# EAGLE board Tarea1 (EAGLE 9.6.2)
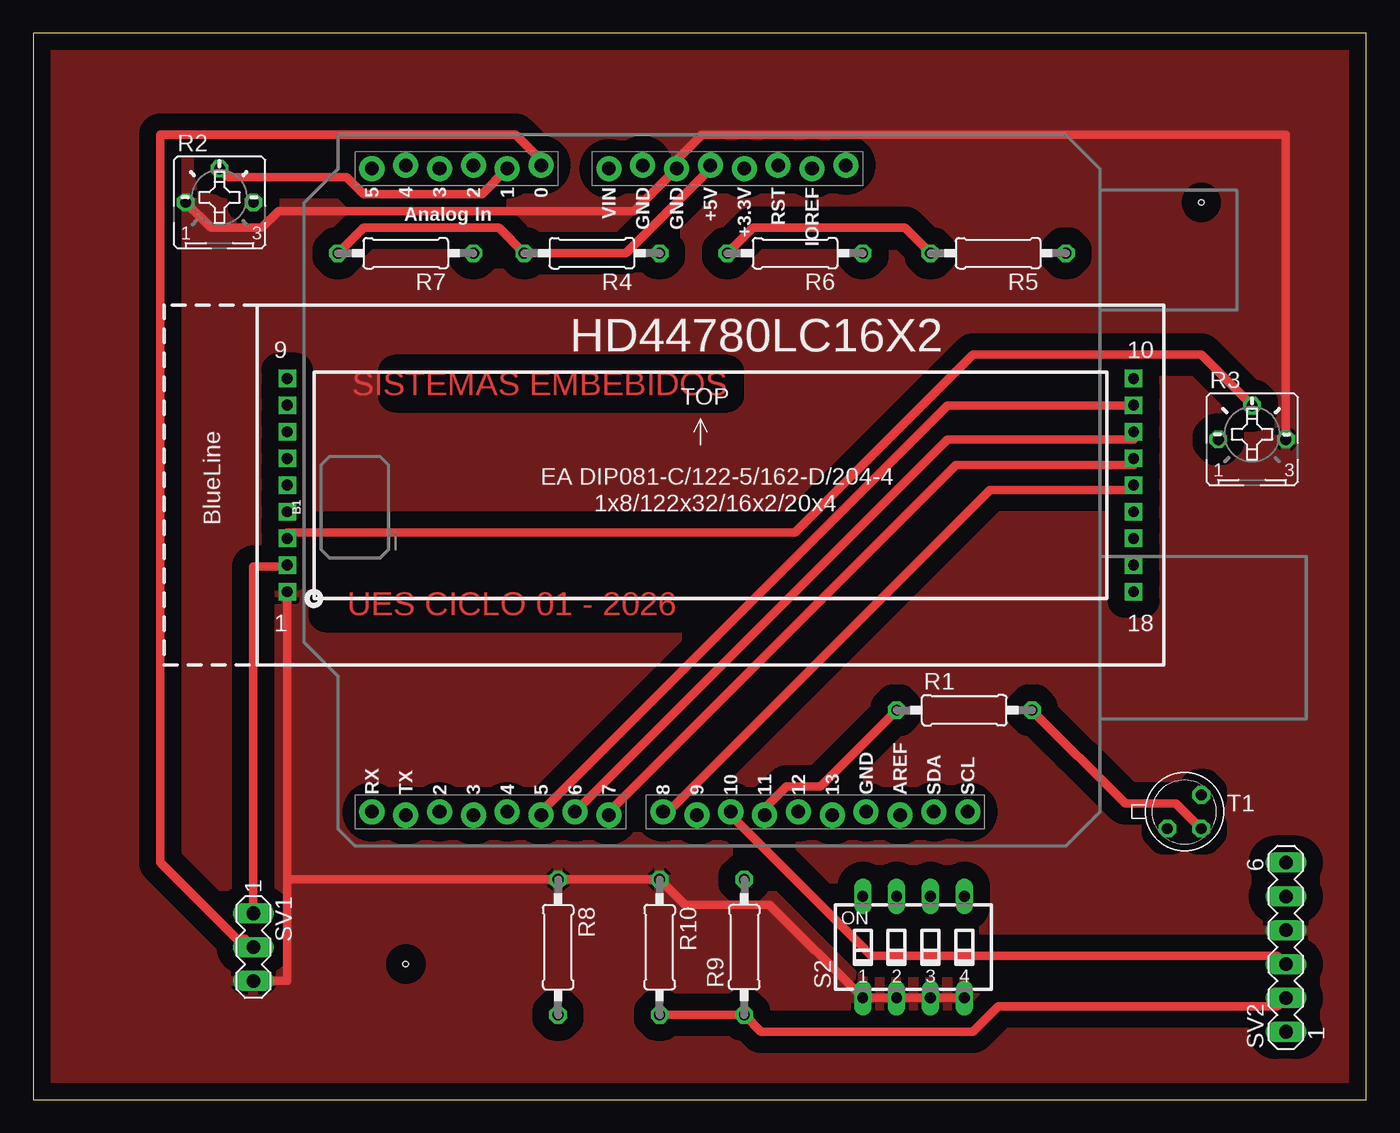
[diagram p0: board, top side]
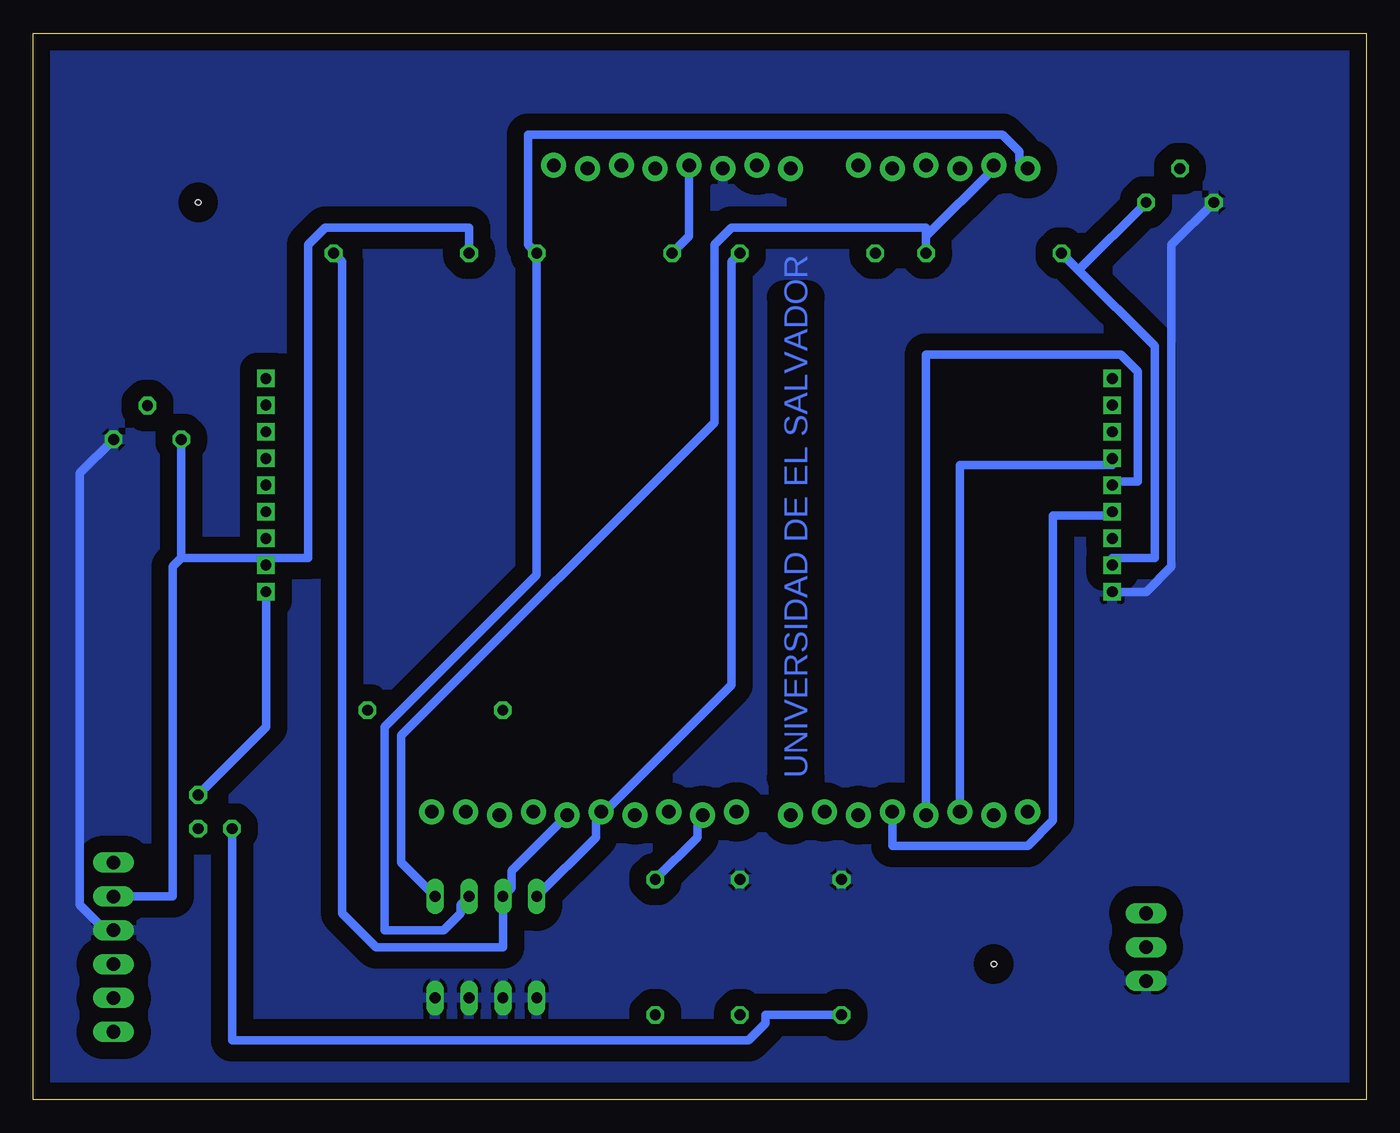
[diagram p1: board, bottom side, seen from below]

Size 100 x 80 mm. Coordinates in mm from the lower left corner, seen from the top.
Outline: 0,0 100,0 100,80 0,80 0,0
Copper layers (1*16): Top 0.035mm / dielectric 1.5mm / Bottom 0.035mm
Design rules "default *": minimum track width 25mil, minimum drill 0.35mm, track to track 18mil, track to pad 18mil, pad to pad 6mil, via to via 16mil, smd to smd 12mil, copper to edge 20mil, drill to drill 6mil, minimum pad ring 10mil, minimum via ring 8mil, stop-mask expansion 4mil, vias tented up to drill 0mil, thermal gap 10mil
Holes 0.41 mm at 27.94,10.16 87.63,67.31 27.94,10.16 87.63,67.31

## Footprints (pad centres in the part's own frame; a part is rotated, then mirrored left to right if it is on the bottom)
UNO_R3_SHIELD_LOCK = drill 1.016 pad 1.88: 3.3V 24.13,-3.81; 5V 24.384,-1.27; A0 24.384,11.43; A1 24.13,13.97; A2 24.384,16.51; A3 24.13,19.05; A4 24.384,21.59; A5 24.13,24.13; AREF -24.384,-15.494; D2 -24.13,19.05; D3 -24.384,16.51; D4 -24.13,13.97; D5 -24.384,11.43; D6 -24.13,8.89; D7 -24.384,6.35; D8 -24.13,2.286; D9 -24.384,-0.254; D10 -24.13,-2.794; D11 -24.384,-5.334; D12 -24.13,-7.874; D13 -24.384,-10.414; GND@0 24.13,1.27; GND@1 24.384,3.81; GND@2 -24.13,-12.954; IOREF 24.13,-8.89; NC 24.384,-11.43; RES 24.384,-6.35; RX -24.13,24.13; SCL -24.13,-20.574; SDA -24.13,-18.034; TX -24.384,21.59; VIN 24.13,6.35
EA_DIP = drill 0.813 pad 1.27 square: 1 0,0; 2 0,2; 3 0,4; 4 0,6; 5 0,8; 6 0,10; 7 0,12; 8 0,14; 9 0,16; 10 63.5,16; 11 63.5,14; 12 63.5,12; 13 63.5,10; 14 63.5,8; 15 63.5,6; 16 63.5,4; 17 63.5,2; 18 63.5,0
0207/10 = drill 0.813 octagon: 1 -5.08,0; 2 5.08,0
B25P = drill 0.813 octagon: A -2.54,0; E 2.54,0; S 0,2.54
SD4-04 = drill 0.813 long: 1 -3.81,-3.81; 2 -1.27,-3.81; 3 1.27,-3.81; 4 3.81,-3.81; 5 3.81,3.81; 6 1.27,3.81; 7 -1.27,3.81; 8 -3.81,3.81
MA03-1 = drill 1.016 long: 1 -2.54,0; 2 0,0; 3 2.54,0
MA06-1 = drill 1.016 long: 1 -6.35,0; 2 -3.81,0; 3 -1.27,0; 4 1.27,0; 5 3.81,0; 6 6.35,0
TO18 = drill 0.813 octagon: 1 -1.27,-1.27; 2 1.27,-1.27; 3 1.27,1.27

## Placement (x,y rotation side)
B1  ARDUINO_UNO_R3_SHIELDUNO_R3_SHIELD_LOCK  [UNO_R3_SHIELD_LOCK]  49.53,45.72 90 top
HD44780LC16X2  EA_DIP  [EA_DIP]  19.05,38.1 0 top
R1  2.2k  [0207/10]  69.85,29.21 0 top
R2  1k  [B25P]  13.97,67.31 0 top
R3  1k  [B25P]  91.44,49.53 0 top
R4  4.7k  [0207/10]  41.91,63.5 180 top
R5  4.7k  [0207/10]  72.39,63.5 180 top
R6  4.7k  [0207/10]  57.15,63.5 180 top
R7  4.7k  [0207/10]  27.94,63.5 180 top
R8  220  [0207/10]  39.37,11.43 270 top
R9  12k  [0207/10]  53.34,11.43 90 top
R10  22k  [0207/10]  46.99,11.43 270 top
S2  [SD4-04]  66.04,11.43 0 top
SV1  MODULO LM35  [MA03-1]  16.51,11.43 270 top
SV2  MODULO BTHC05  [MA06-1]  93.98,11.43 90 top
T1  2N2222  [TO18]  86.36,21.59 0 top

## Library data of the parts
B1 = SparkFun-Boards
HD44780LC16X2 = display-lcd
R1 R4-R10 = rcl; SPICEPREFIX: R
R2 R3 = pot
S2 = switch-dil; OC_FARNELL: unknown; OC_NEWARK: unknown
SV1 SV2 = con-lstb; OC_FARNELL: unknown; OC_NEWARK: unknown
T1 = transistor

## Nets
+5V: B1.5V HD44780LC16X2.2 HD44780LC16X2.17 R2.E R3.A R4.2 R5.2 R6.2 R7.2 SV1.1 SV2.5
GND: B1.GND@0 HD44780LC16X2.1 R2.A R3.E R8.1 R10.1 S2.1 S2.2 S2.3 S2.4 SV1.3 SV2.4
N$1: B1.D12 R4.1 S2.8
N$2: B1.A1 R2.S
N$3: B1.A0 SV1.2
N$4: B1.D13 R5.1 S2.7
N$5: B1.A5 R6.1 S2.6
N$6: B1.A4 R7.1 S2.5
N$7: R8.2 T1.1
N$8: R1.2 T1.2
N$9: HD44780LC16X2.18 T1.3
N$10: R9.1 R10.2 SV2.2
N$11: HD44780LC16X2.3 R3.S
N$12: B1.D11 R1.1
N$13: B1.D9 R9.2
N$14: B1.D10 SV2.3
N$15: B1.D2 HD44780LC16X2.6
N$16: B1.D3 HD44780LC16X2.5
N$17: B1.D4 HD44780LC16X2.4
N$18: B1.D5 HD44780LC16X2.11
N$19: B1.D6 HD44780LC16X2.12
N$20: B1.D7 HD44780LC16X2.13
N$21: B1.D8 HD44780LC16X2.14

## Tracks (layer width: path | path; a pad name or v marks a point on that pad's centre or on a via)
+5V
  Top 0.635: R5.2 65.41,65.41 53.98,65.41 R6.2 | R7.2 24.77,65.41 34.92,65.41 R4.2 44.45,63.5 50.8,69.85 B1.5V | SV1.1 16.51,40.01 19.05,40.01 HD44780LC16X2.2
  Bottom 0.635: 88.9,40.64 82.55,40.64 | R3.A 88.9,40.64 | SV2.5 89.53,15.24 89.53,40.01 88.9,40.64 | R6.2 50.8,64.77 B1.5V | R7.2 21.59,62.23 | 21.59,62.23 15.88,56.52 15.88,40.64 19.05,40.64 HD44780LC16X2.2 | 21.59,62.23 R2.E | 82.55,40.64 79.38,40.64 79.38,64.14 78.11,65.41 67.31,65.41 R5.2 | 82.55,40.64 HD44780LC16X2.17
GND
  Top 0.635: S2.4 S2.3 S2.2 S2.1 55.24,14.61 48.9,14.61 R10.1 R8.1 19.05,16.51 | 19.05,16.51 19.05,8.89 SV1.3 | 19.05,16.51 HD44780LC16X2.1 | R2.A 13.34,65.41 17.14,65.41 18.41,66.67 45.09,66.67 B1.GND@0 48.26,70.48 50.16,72.39 93.98,72.39 R3.E
  Bottom 0.635: R3.E 96.52,46.99 96.52,14.61 94.61,12.7 SV2.4 | R2.A 14.61,64.14 14.61,40.01 16.51,38.1 HD44780LC16X2.1
  pour Top (isolate 1.27): 0,80.01 100.33,80.01 100.33,0 0,0
  pour Bottom (isolate 1.27): 0,80.01 100.33,80.01 100.33,0 0,0
N$1
  Bottom 0.635: S2.8 57.78,19.68 57.78,21.59 B1.D12 57.15,21.59 47.62,31.11 47.62,62.87 R4.1
N$2
  Top 0.635: R2.S 14.61,69.22 23.5,69.22 24.77,67.94 33.66,67.94 B1.A1
N$3
  Top 0.635: SV1.2 15.88,12.06 15.24,12.06 9.53,17.78 9.53,72.39 36.2,72.39 38.1,70.48 B1.A0
N$4
  Bottom 0.635: B1.D13 64.14,17.14 64.14,15.88 S2.7 64.77,11.43 74.3,11.43 76.83,13.97 76.83,62.87 R5.1
N$5
  Bottom 0.635: S2.6 67.94,14.61 67.94,13.97 69.22,12.7 73.66,12.7 73.66,27.94 62.23,39.37 R6.1 62.87,64.14 62.87,72.39 27.3,72.39 26.04,71.12 26.04,70.48 B1.A5
N$6
  Bottom 0.635: S2.5 72.39,17.78 72.39,27.3 48.9,50.8 48.9,64.14 47.62,65.41 33.02,65.41 33.02,64.77 | R7.1 33.02,64.77 | 33.02,64.77 27.94,69.85 B1.A4
N$7
  Bottom 0.635: R8.2 45.09,6.35 45.09,5.71 46.35,4.45 85.09,4.45 T1.1
N$8
  Top 0.635: R1.2 81.92,22.23 85.72,22.23 T1.2
N$9
  Bottom 0.635: T1.3 82.55,27.94 HD44780LC16X2.18
N$10
  Top 0.635: R10.2 R9.1 54.61,5.08 70.48,5.08 72.39,6.99 93.34,6.99 SV2.2
N$11
  Top 0.635: R3.S 87.63,55.88 70.48,55.88 57.15,42.55 19.05,42.55 HD44780LC16X2.3
N$12
  Top 0.635: R1.1 59.05,23.5 56.52,23.5 54.61,21.59 B1.D11
N$13
  Bottom 0.635: R9.2 50.16,19.68 50.16,20.95 B1.D9
N$14
  Top 0.635: SV2.3 93.34,10.79 62.87,10.79 52.07,21.59 B1.D10
N$15
  Bottom 0.635: B1.D2 30.48,47.62 19.05,47.62 HD44780LC16X2.6
N$16
  Bottom 0.635: B1.D3 33.02,55.88 18.41,55.88 17.14,54.61 17.14,46.35 19.05,46.35 HD44780LC16X2.5
N$17
  Bottom 0.635: B1.D4 35.56,19.05 25.4,19.05 23.5,20.95 23.5,43.81 19.05,43.81 HD44780LC16X2.4
N$18
  Top 0.635: HD44780LC16X2.11 82.55,52.07 68.58,52.07 38.1,21.59 B1.D5
N$19
  Top 0.635: B1.D6 68.58,49.53 82.55,49.53 HD44780LC16X2.12
N$20
  Top 0.635: HD44780LC16X2.13 82.55,47.62 69.22,47.62 43.18,21.59 B1.D7
N$21
  Top 0.635: HD44780LC16X2.14 82.55,45.72 71.75,45.72 47.62,21.59 B1.D8

## Text on the board
Top: SISTEMAS EMBEBIDOS | UES CICLO 01 - 2026
Bottom: UNIVERSIDAD DE EL SALVADOR